# Altium PCB NU-SYNTHS_MIDICV_CONN_8HP.PcbDoc
Units mm, origin at the board's own origin, x right, y up, seen from the top; angles counter-clockwise.
Board outline 39.3 x 106.5 mm, 2 copper layers (Top Layer, Bottom Layer), stack 1.55 mm thick; 48 components, 49 nets, 196 pads, 36 vias.
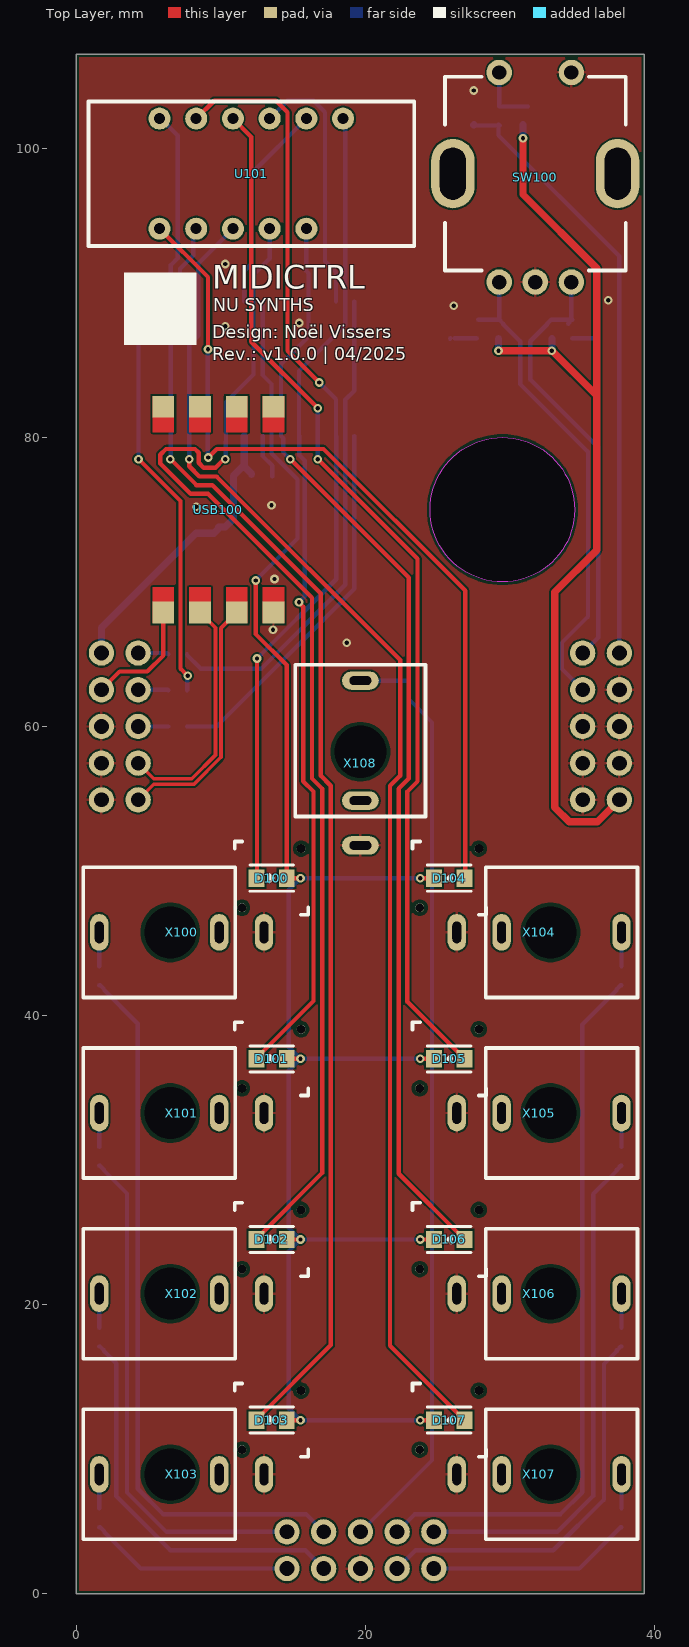
[diagram p0: Top Layer view]
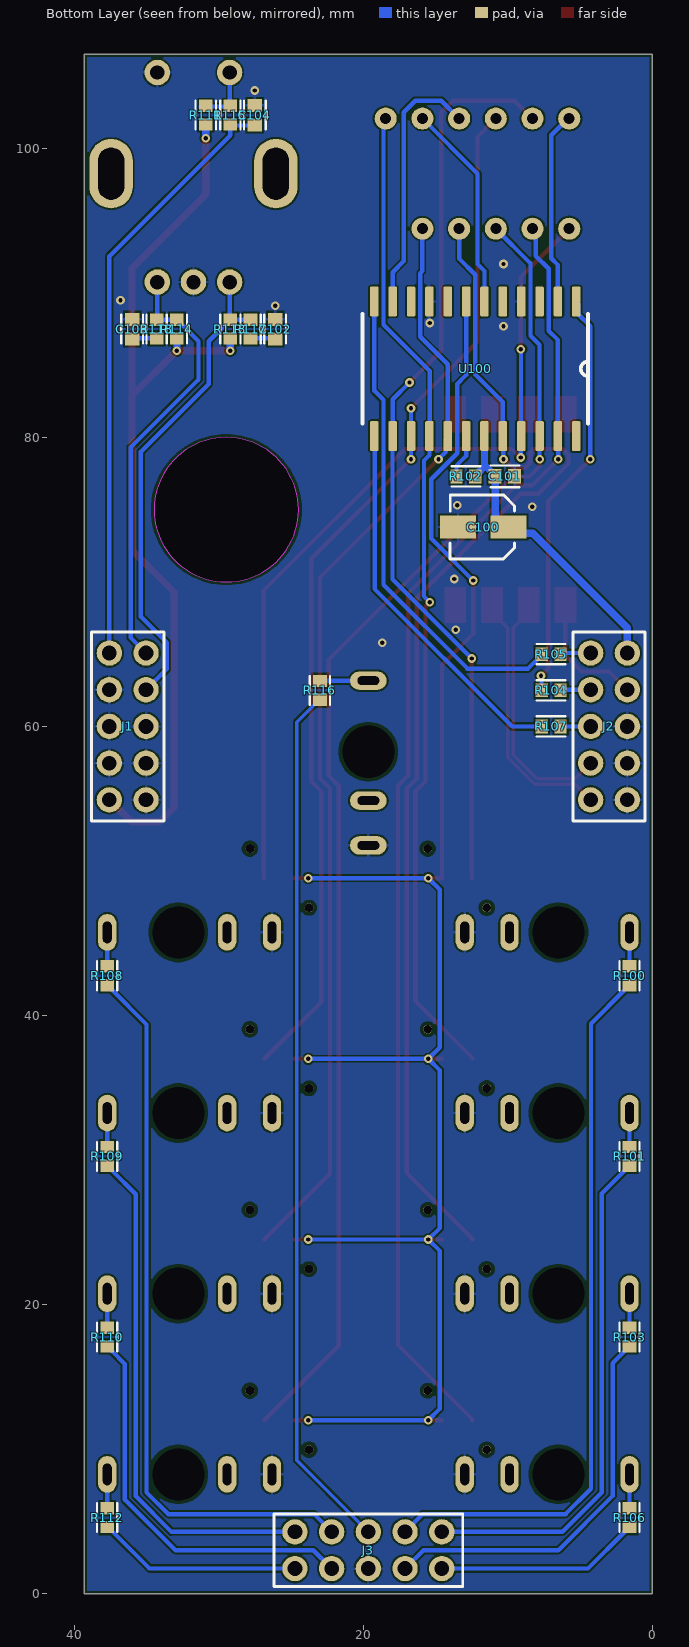
[diagram p1: Bottom Layer view, seen from below]
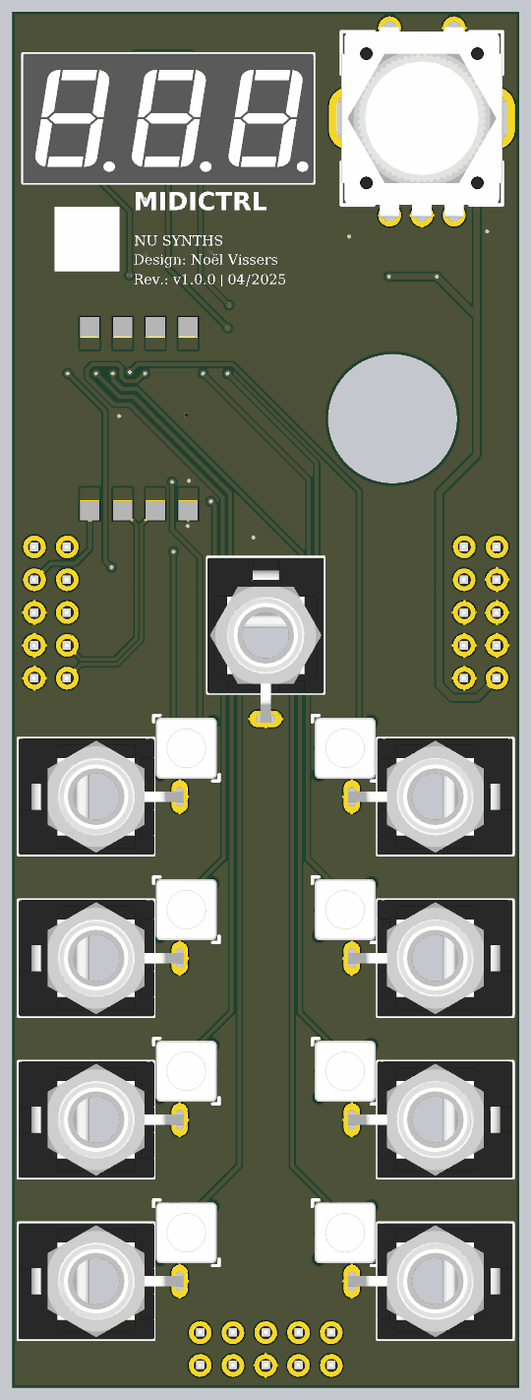
[diagram p2: 3D render of the assembled board from above, using the file's embedded part models]
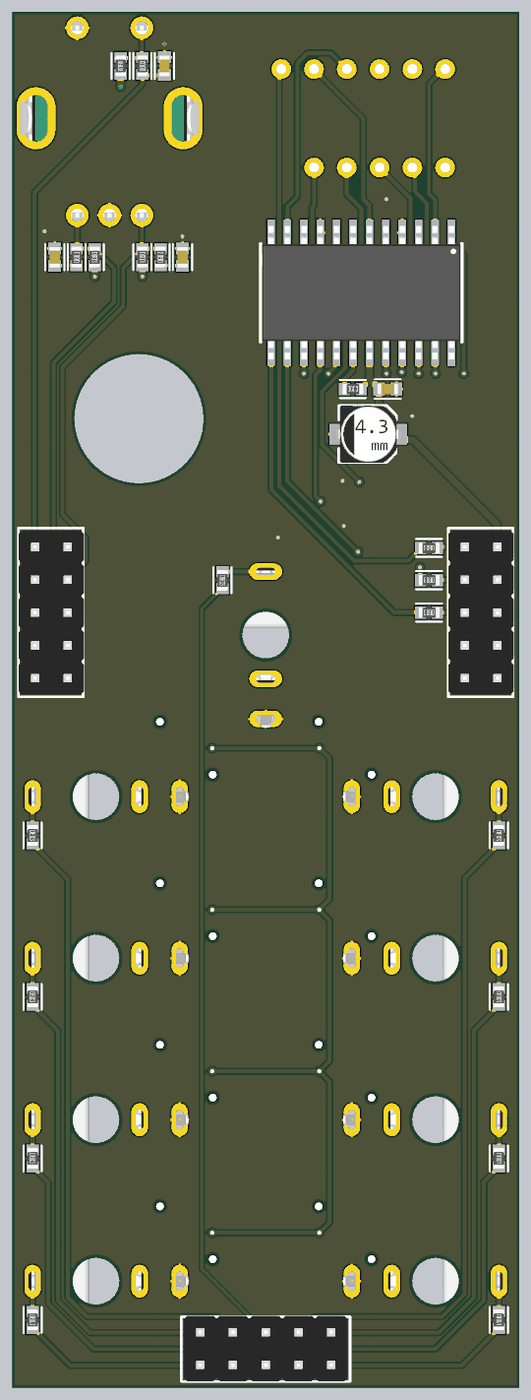
[diagram p3: 3D render of the assembled board from below, using the file's embedded part models]

## Layer stack, top to bottom
Top Solder: solder mask 0.0127, Solder Resist, Dk 3.5
Top Layer: signal copper 0.025
Dielectric 1: dielectric 1.5, FR-4, Dk 4.8
Bottom Layer: signal copper 0.025
Bottom Solder: solder mask 0.0127, Solder Resist, Dk 3.5

## Board outline
0,0 39.3,0 39.3,106.5 0,106.5
cut-out: 29.475,70 cw(c29.475,75) 24.475,75 cw(c29.475,75) 29.475,80 cw(c29.475,75) 34.475,75 cw(c29.475,75)

## Design rules (kind name [scope] priority, off if disabled: settings)
BoardOutlineClearance [All] p1: gap=0.2 ignorepadtopadclearanceinfootprint=FALSE
Clearance [All] p1: gap=0.127 ignorepadtopadclearanceinfootprint=FALSE except(0.25: Arc-Hole Track-Hole SMDPad-Hole THPad-Hole Via-Hole Fill-Hole Poly-Hole Region-Hole Text-Hole)
ComponentClearance [All] p1: gap=0.127 collisioncheckmode=3 verticalgap=0.127 showdistances=TRUE
DiffPairsRouting [All] p1: maxlimit=0.254 minlimit=0.127 mostfreqgap=0.127 toplayer_minwidth=0.127 toplayer_maxwidth=25.4 toplayer_prefwidth=0.127 bottomlayer_minwidth=0.127 bottomlayer_maxwidth=25.4 bottomlayer_prefwidth=0.127 maxuncoupledlength=12.7
Height [All] p1: minheight=0 maxheight=1816.048 prefheight=12.7
HoleSize [All] p1: absolutevalues=TRUE maxlimit=6.3 minlimit=0.3 maxpercent=80.000 minpercent=20.000
HoleToHoleClearance [All] p1: gap=0.25 allowstackedmicrovias=FALSE
MinimumAnnularRing [All] p1: minimumring=0.076
MinimumSolderMaskSliver [All] p1: minsoldermaskwidth=0
PlaneClearance [All] p1: clearance=0.127
PlaneConnect PlaneConnectPowerPads [InPadClass('PowerPads')] p1: planeconnectstyle=Direct reliefexpansion=0.508 reliefentries=4 reliefconductorwidth=0.254 reliefairgap=0.254
PlaneConnect [All] p2: pad.planeconnectstyle=Relief pad.reliefexpansion=0.3 pad.reliefentries=4 pad.reliefconductorwidth=0.127 pad.reliefairgap=0.127 via.planeconnectstyle=Direct via.reliefexpansion=0.3 via.reliefentries=4 via.reliefconductorwidth=0.127 via.reliefairgap=0.127
PolygonConnect PolygonConnectPowerPads [All vs (InPadClass('PowerPads'))] p1: connectstyle=Direct reliefconductorwidth=0.254 reliefentries=4 polygonreliefangle="90 Angle" airgapwidth=0.254
PolygonConnect [All] p2: thpad.connectstyle=Relief thpad.reliefconductorwidth=0.2 thpad.reliefentries=4 thpad.polygonreliefangle="90 Angle" thpad.airgapwidth=0.127 smdpad.connectstyle=Relief smdpad.reliefconductorwidth=0.2 smdpad.reliefentries=4 smdpad.polygonreliefangle="90 Angle" smdpad.airgapwidth=0.127 via.connectstyle=Direct via.reliefconductorwidth=0.127 via.reliefentries=4 via.polygonreliefangle="90 Angle" via.airgapwidth=0.127
RoomDefinition NU-SYNTHS_MIDICV_CONN [InComponentClass('NU-SYNTHS_MIDICV_CONN')] p1: confinementstyle=ConfineIn formatcopy=TRUE lockcomponents=FALSE outline 0,0 39.3,0 39.3,106.5 0,106.5
RoutingVias [All] p1: holewidth=0.3 width=0.6 viastyle="Through Hole" minholewidth=0.3 minwidth=0.6 maxholewidth=0.6 maxwidth=6.6
SilkToSilkClearance [All] p1: silktosilkclearance=0
SilkToSolderMaskClearance [IsPad] p1: minsilkscreentomaskgap=0.127 clearancetoexposedcopper=TRUE
SolderMaskExpansion [All] p1: expansion=0.075 istentingtop=FALSE
SupplyNets "Schematic Supply Nets_3" [InNet('+3V3')] p1: voltage=0.000
SupplyNets "Schematic Supply Nets_2" [InNet('GND')] p2: voltage=0.000
SupplyNets "Schematic Supply Nets_1" [InNet('VBUS')] p3: voltage=0.000
SupplyNets "Schematic Supply Nets" [InNet('+5V')] p4: voltage=0.000
Width [All] p1: maxlimit=25.4 minlimit=0.127 preferedwidth=0.127 minimp=50.000000 maximp=50.000000 favimp=50.000000
20 further rules are at their usual default settings.

## Classes and differential pairs
differential pair USB_D: +USB_D_P -USB_D_N

## Components (designator, comment, footprint, x,y, rotation, side; value= is the part's Value field where it differs from the comment)
C100 "10 µF" "CAP ALSMD 4.3MM H5.4MM" 11.7,73.8 r0 bottom
C101 "0.1 µF" "CAP 0603_1608" 10.2,77.3 r0 bottom
C102 "10000 pF" "CAP 0603_1608" 26.1,87.5 r270 bottom
C103 "10000 pF" "CAP 0603_1608" 36,87.5 r270 bottom
C104 "0.1 µF" "CAP 0603_1608" 27.5,102.3 r270 bottom
D100 "150080RS75000" LED0805_PIPE 13.5,49.5 r180 top locked
D101 "150080RS75000" LED0805_PIPE 13.5,37 r180 top locked
D102 "150080RS75000" LED0805_PIPE 13.5,24.5 r180 top locked
D103 "150080RS75000" LED0805_PIPE 13.5,12 r180 top locked
D104 "150080RS75000" LED0805_PIPE 25.8,49.5 r0 top locked
D105 "150080RS75000" LED0805_PIPE 25.8,37 r0 top locked
D106 "150080RS75000" LED0805_PIPE 25.8,24.5 r0 top locked
D107 "150080RS75000" LED0805_PIPE 25.8,12 r0 top
J1 "GENERIC_HEADER_2x5" HEADER_2x5_TH_MALE_MIRRORED 36.3,60 r180 bottom
J2 "GENERIC_HEADER_2x5" HEADER_2x5_TH_MALE_MIRRORED 3,60 r180 bottom
J3 "GENERIC_HEADER_2x5" HEADER_2x5_TH_MALE_MIRRORED 19.65,3 r90 bottom
R100 "1 kOhms" "RES 0603_1608" 1.58,42.75 r270 bottom
R101 "1 kOhms" "RES 0603_1608" 1.58,30.25 r270 bottom
R102 "9.53 kOhms" "RES 0603_1608" 12.9,77.3 r180 bottom
R103 "1 kOhms" "RES 0603_1608" 1.58,17.75 r270 bottom
R104 "27 Ohms" "RES 0603_1608" 7,62.5 r0 bottom
R105 "27 Ohms" "RES 0603_1608" 7,65 r0 bottom
R106 "1 kOhms" "RES 0603_1608" 1.58,5.25 r270 bottom
R107 "27 Ohms" "RES 0603_1608" 7,60 r0 bottom
R108 "1 kOhms" "RES 0603_1608" 37.72,42.75 r270 bottom
R109 "1 kOhms" "RES 0603_1608" 37.72,30.25 r270 bottom
R110 "1 kOhms" "RES 0603_1608" 37.72,17.75 r270 bottom
R111 "100 kOhms" "RES 0603_1608" 30.9,102.3 r270 bottom
R112 "1 kOhms" "RES 0603_1608" 37.72,5.25 r270 bottom
R113 "10 kOhms" "RES 0603_1608" 29.2,87.5 r270 bottom
R114 "10 kOhms" "RES 0603_1608" 32.9,87.5 r270 bottom
R115 "10 kOhms" "RES 0603_1608" 29.2,102.3 r90 bottom
R116 "1 kOhms" "RES 0603_1608" 23,62.5 r270 bottom
R117 "10 kOhms" "RES 0603_1608" 27.8,87.5 r90 bottom
R118 "10 kOhms" "RES 0603_1608" 34.3,87.5 r90 bottom
SW100 "PEC11R-4220K-S0024" PEC11R-4220K-S0024 31.75,98.25 r0 top locked
U100 "MAX7221" SOIC127P1032X265-24N 12.25,84.75 r270 bottom
U101 "LDT-N2804RI" LDT-N2804RI 5.75,94.44 r0 top locked
USB100 "USB_Type_C_Breakout" USBC_BREAKOUT_NO_TH 9.825,75 r0 top locked
X100 "PJ398SM" PJ398SM 1.58,45.75 r90 top locked
X101 "PJ398SM" PJ398SM 1.58,33.25 r90 top locked
X102 "PJ398SM" PJ398SM 1.58,20.75 r90 top locked
X103 "PJ398SM" PJ398SM 1.58,8.25 r90 top locked
X104 "PJ398SM" PJ398SM 37.72,45.75 r270 top locked
X105 "PJ398SM" PJ398SM 37.72,33.25 r270 top locked
X106 "PJ398SM" PJ398SM 37.72,20.75 r270 top locked
X107 "PJ398SM" PJ398SM 37.72,8.25 r270 top locked
X108 "PJ398SM" PJ398SM 19.65,63.17 r0 top locked

## Footprints (in the part's own frame and the unit in brackets; to place one, negate y for a bottom-side part, rotate by r counter-clockwise, add the part's x,y. Pads: shape width x height; smd on the part's side, far side on the other; paste and mask are expansions set on the pad)
"CAP 0603_1608" [mm] "Chip Capacitor, 2-Leads, Body 1.60x0.80mm, IPC Medium Density"
  rect 0.9x1 smd: 1(-0.675,0) 2(0.675,0)
  silkscreen extent -1,-0.75 1,0.75, body extent -0.8,-0.41 0.8,0.41, height 0.82
"CAP ALSMD 4.3MM H5.4MM" [mm] "Aluminum Electrolytic Capacitor, Body 4.30x4.30x5.40mm, IPC Low Density"
  rect 2.5x1.6 smd: 1(-1.75,0) 2(1.75,0)
  silkscreen extent -2.17,-2.21 2.3,2.2, body extent -2.3,-2.2 2.3,2.2, height 5.4
HEADER_2x5_TH_MALE_MIRRORED [mm] "2.54mm 2x5 MALE"
  round 1.75 hole 1.02: 1(1.27,5.08) 2(-1.27,5.08) 3(1.27,2.54) 4(-1.27,2.54) 5(1.27,0) 6(-1.27,0) 7(1.27,-2.54) 8(-1.27,-2.54) 9(1.27,-5.08) 10(-1.27,-5.08)
  silkscreen extent -2.5,-6.53 2.5,6.54, body extent -2.5,-6.35 2.58,6.35, height 8.91
LDT-N2804RI [mil] "Common Cathode, 3 Digit 7 Segment Display, 0.28''"
  round 60 hole 30: 1(0,0) 2(100,0) 3(200,0) 4(300,0) 5(400,0) 7(500,300) 8(400,300) 9(300,300) 10(200,300) 11(100,300) 12(0,300)
  silkscreen extent -194,-47 694,347, body extent -194,-47 694,347, height 315
LED0805_PIPE [mm]
  rect 1.1x1.2 smd: 1(-1.05,0) 2(1.05,0)
  round 0.61 hole 0.61 unplated: ""(-2.045,-2.045) ""(2.045,2.045)
  silkscreen extent -2.54,-2.54 2.54,2.54, body extent -2.35,-2.35 2.35,2.35, height 12.7
PEC11R-4220K-S0024 [mm] "Encoders 20mm SHAFT w/SWITCH"
  round 1.762 hole 1: 1(-2.5,7) 2(2.5,7) A(-2.5,-7.5) B(2.5,-7.5) C(0,-7.5)
  oval 3x4.8 hole 1.8 slot 3.6 at 90 deg: S1(-5.7,0) S2(5.7,0)
  silkscreen extent -6.25,-6.7 6.25,6.7, body extent -6.93,-7.68 6.93,7.18, height 3.29
PJ398SM [mm] "Vertical mount 3.5mm switching mono phone jack"
  oval 2.54x1.27 hole 0.6 slot 1.5 at 0 deg: 1(0,-11.4) 2(0,-8.3) 3(0,0)
  round 0 hole 3.6 unplated: NC(0,-4.92)
  silkscreen extent -4.5,-9.4 4.5,1.1, body extent -4.5,-12.09 4.5,1.07, height 14.53
"RES 0603_1608" [mm] "Chip Resistor, 2-Leads, Body 1.60x0.80mm, IPC Medium Density"
  rect 0.85x0.95 smd: 1(-0.65,0) 2(0.65,0)
  silkscreen extent -1,-0.7 1,0.7, body extent -0.8,-0.4 0.8,0.4, height 0.45
SOIC127P1032X265-24N [mm] "24 PIN SOIC PACKAGE"
  rrect25% 2.05x0.59 smd: 1(-4.655,6.985) 2(-4.655,5.715) 3(-4.655,4.445) 4(-4.655,3.175) 5(-4.655,1.905) 6(-4.655,0.635) 7(-4.655,-0.635) 8(-4.655,-1.905) 9(-4.655,-3.175) 10(-4.655,-4.445) 11(-4.655,-5.715) 12(-4.655,-6.985) 13(4.655,-6.985) 14(4.655,-5.715) 15(4.655,-4.445) 16(4.655,-3.175) 17(4.655,-1.905) 18(4.655,-0.635) 19(4.655,0.635) 20(4.655,1.905) 21(4.655,3.175) 22(4.655,4.445) 23(4.655,5.715) 24(4.655,6.985)
  silkscreen extent -3.8,-7.8 3.8,7.8, body extent -5.16,-7.7 5.16,7.7, height 2.62
USBC_BREAKOUT_NO_TH [mm]
  rect 1.5x1.5 smd: 1(-3.81,-7.112) 2(-1.27,-7.112) 3(1.27,-7.112) 4(3.81,-7.112) 5(3.81,7.112) 6(1.27,7.112) 7(-1.27,7.112) 8(-3.81,7.112)
  Top Layer region: -3.06,7.85 -4.56,7.85 -4.56,5.35 -3.06,5.35
  Top Layer region: -0.52,7.85 -2.02,7.85 -2.02,5.35 -0.52,5.35
  Top Layer region: 2.02,7.85 0.52,7.85 0.52,5.35 2.02,5.35
  Top Layer region: 4.56,7.85 3.06,7.85 3.06,5.35 4.56,5.35
  Top Layer region: 3.06,-7.85 4.56,-7.85 4.56,-5.35 3.06,-5.35
  Top Layer region: -4.56,-7.85 -3.06,-7.85 -3.06,-5.35 -4.56,-5.35
  Top Layer region: -2.02,-7.85 -0.52,-7.85 -0.52,-5.35 -2.02,-5.35
  Top Layer region: 0.52,-7.85 2.02,-7.85 2.02,-5.35 0.52,-5.35

## Part data
C100: library part UWX1C100MCL1GB, "CAP ALUM 10UF 20% 16V SMD", Device Package="Radial, Can - SMD", Lifetime @ Temp.="2000 Hrs @ 85°C", manufacturer=Nichicon, Operating Temperature="-40°C ~ 85°C", Ripple Current @ High Frequency="34.5 mA @ 10 kHz", Ripple Current @ Low Frequency="23 mA @ 120 Hz", Supplier Part Number 1=493-2100-1-ND, Tolerance=±20%, Voltage - Rated="16 V", Applications="General Purpose", Capacitance="10 µF", componentlink1description=Datasheet, componentlink1url=https://products.nichicon.co.jp/en/pdf/XJA043/e-uwx.pdf, componentlink2description="DigiKey Link", componentlink2url=https://www.digikey.com/en/products/detail/nichicon/UWX1C100MCL1GB/589841, Height - Seated (Max)="0.213\" (5.40mm)", lastupdated="03/06/2024 19:53:00", Lifecycle Status=Active, Minimum Order=1, Mounting Type="Surface Mount", Package / Case="Radial, Can - SMD", packaging=TapeAndReel, Part Number=UWX1C100MCL1GB, Part Status=Active, partid=7030, Polarization=Polar, price=0.06, series=UWX, Size / Dimension="0.157\" Dia (4.00mm)", Supplier 1=DigiKey, Surface Mount Land Size="0.169\" L x 0.169\" W (4.30mm x 4.30mm)"
C101 C104: library part CC0603MRY5V8BB104, "CAP CER 0.1UF 25V Y5V 0603", Device Package="0603 (1608 Metric)", manufacturer=Yageo, Operating Temperature="-30°C ~ 85°C", Supplier Part Number 1=311-1363-1-ND, Temperature Coefficient="Y5V (F)", Tolerance=±20%, Voltage - Rated=25V, Applications="General Purpose", Capacitance="0.1 µF", componentlink1description=Datasheet, componentlink1url=http://www.yageo.com/documents/recent/UPY-GPHC_Y5V_6.3V-to-50V_8.pdf, componentlink2description="DigiKey Link", componentlink2url=https://www.digikey.com/en/products/detail/yageo/CC0603MRY5V8BB104/2103101, lastupdated="09/02/2024 20:10:27", Lifecycle Status=Active, Minimum Order=1, Mounting Type="Surface Mount, MLCC", Package / Case="0603 (1608 Metric)", packaging=TapeAndReel, Part Number=CC0603MRY5V8BB104, Part Status=Active, partid=5132, price=0.01, series=CC, Size / Dimension="0.063\" L x 0.031\" W (1.60mm x 0.80mm)", Supplier 1=DigiKey, Thickness (Max)="0.035\" (0.90mm)"
C102 C103: library part CC0603KRX7R9BB103, "CAP CER 10000PF 50V X7R 0603", Device Package="0603 (1608 Metric)", manufacturer=Yageo, Operating Temperature="-55°C ~ 125°C", Supplier Part Number 1=311-1085-1-ND, Temperature Coefficient=X7R, Tolerance=±10%, Voltage - Rated=50V, Applications="General Purpose", Capacitance="10000 pF", componentlink1description=Datasheet, componentlink1url=https://www.yageo.com/upload/media/product/productsearch/datasheet/mlcc/UPY-GPHC_X7R_6.3V-to-50V_18.pdf, componentlink2description="DigiKey Link", componentlink2url=https://www.digikey.com/en/products/detail/yageo/CC0603KRX7R9BB103/302819, lastupdated="09/02/2024 20:10:06", Lifecycle Status=Active, Minimum Order=1, Mounting Type="Surface Mount, MLCC", Package / Case="0603 (1608 Metric)", packaging=TapeAndReel, Part Number=CC0603KRX7R9BB103, Part Status=Active, partid=17848, price=0.01, series=CC, Size / Dimension="0.063\" L x 0.031\" W (1.60mm x 0.80mm)", Supplier 1=DigiKey, Thickness (Max)="0.035\" (0.90mm)"
D100 D101 D102 D103 D104 D105 D106 D107: "Standard LEDs - SMD WL-SMCW SMDMono TpVw Waterclr 0805 Red"
J1 J2 J3: "Generic 2x5 header", Supplier Part Number 1=2396199, Supplier 1=Farnell
R100 R101 R103 R106 R108 R109 R110 R112 R116: library part CRCW06031K00FKEAC, "RES 1K OHM 1% 1/10W 0603", Device Package="0603 (1608 Metric)", manufacturer="Vishay Dale", Operating Temperature="-55°C ~ 155°C", Power (Watts)="0.1W, 1/10W", Supplier Device Package=0603, Supplier Part Number 1=541-3949-1-ND, Temperature Coefficient=±100ppm/°C, Tolerance=±1%, componentlink1description=Datasheet, componentlink1url=http://www.vishay.com/docs/28773/crcwce3.pdf, componentlink2description="DigiKey Link", componentlink2url=https://www.digikey.com/en/products/detail/vishay-dale/CRCW06031K00FKEAC/7928371, Composition="Thick Film", Height - Seated (Max)="0.022\" (0.55mm)", lastupdated="09/02/2024 20:43:06", Lifecycle Status=Active, Minimum Order=1, Number of Terminations=2, Package / Case="0603 (1608 Metric)", packaging=CutTape, Part Number=CRCW06031K00FKEAC, Part Status=Active, partid=12551, price=0.01, Resistance="1 kOhms", series=CRCW-C, Supplier 1=DigiKey
R102: library part CRCW06039K53FKEA, "RES SMD 9.53K OHM 1% 1/10W 0603", Device Package="0603 (1608 Metric)", manufacturer="Vishay Dale", Operating Temperature="-55°C ~ 155°C", Power (Watts)="0.1W, 1/10W", Ratings=AEC-Q200, Supplier Device Package=0603, Supplier Part Number 1=541-9.53KHCT-ND, Temperature Coefficient=±100ppm/°C, Tolerance=±1%, componentlink1description=Datasheet, componentlink1url=http://www.vishay.com/docs/20035/dcrcwe3.pdf, componentlink2description="DigiKey Link", componentlink2url=https://www.digikey.com/en/products/detail/vishay-dale/CRCW06039K53FKEA/1174780, Composition="Thick Film", Features="Automotive AEC-Q200", Height - Seated (Max)="0.020\" (0.50mm)", lastupdated="09/02/2024 20:42:37", Lifecycle Status=Active, Minimum Order=1, Number of Terminations=2, Package / Case="0603 (1608 Metric)", packaging=TapeAndReel, Part Number=CRCW06039K53FKEA, Part Status=Active, partid=20117, price=0.01, Resistance="9.53 kOhms", series=CRCW, Size / Dimension="0.061\" L x 0.033\" W (1.55mm x 0.85mm)", Supplier 1=DigiKey
R104 R105 R107: library part CRCW060327R0FKEA, "RES SMD 27 OHM 1% 1/10W 0603", Device Package="0603 (1608 Metric)", manufacturer="Vishay Dale", Operating Temperature="-55°C ~ 155°C", Power (Watts)="0.1W, 1/10W", Ratings=AEC-Q200, Supplier Device Package=0603, Supplier Part Number 1=541-27.0HCT-ND, Temperature Coefficient=±100ppm/°C, Tolerance=±1%, componentlink1description=Datasheet, componentlink1url=http://www.vishay.com/docs/20035/dcrcwe3.pdf, componentlink2description="DigiKey Link", componentlink2url=https://www.digikey.com/en/products/detail/vishay-dale/CRCW060327R0FKEA/1174487, Composition="Thick Film", Features="Automotive AEC-Q200", Height - Seated (Max)="0.020\" (0.50mm)", lastupdated="09/02/2024 20:43:24", Lifecycle Status=Active, Minimum Order=1, Number of Terminations=2, Package / Case="0603 (1608 Metric)", packaging=TapeAndReel, Part Number=CRCW060327R0FKEA, Part Status=Active, partid=8035, price=0.01, Resistance="27 Ohms", series=CRCW, Size / Dimension="0.061\" L x 0.033\" W (1.55mm x 0.85mm)", Supplier 1=DigiKey
R111: library part CRCW0603100KFKEAC, "RES 100K OHM 1% 1/10W 0603", Device Package="0603 (1608 Metric)", manufacturer="Vishay Dale", Operating Temperature="-55°C ~ 155°C", Power (Watts)="0.1W, 1/10W", Supplier Device Package=0603, Supplier Part Number 1=541-3950-1-ND, Temperature Coefficient=±100ppm/°C, Tolerance=±1%, componentlink1description=Datasheet, componentlink1url=http://www.vishay.com/docs/28773/crcwce3.pdf, componentlink2description="DigiKey Link", componentlink2url=https://www.digikey.com/en/products/detail/vishay-dale/CRCW0603100KFKEAC/7928372, Composition="Thick Film", Height - Seated (Max)="0.022\" (0.55mm)", lastupdated="09/02/2024 20:43:06", Lifecycle Status=Active, Minimum Order=1, Number of Terminations=2, Package / Case="0603 (1608 Metric)", packaging=CutTape, Part Number=CRCW0603100KFKEAC, Part Status=Active, partid=12549, price=0.01, Resistance="100 kOhms", series=CRCW-C, Supplier 1=DigiKey
R113 R114 R115 R117 R118: library part CRCW060310K0FKTA, "RES SMD 10K OHM 1% 1/10W 0603", Device Package="0603 (1608 Metric)", manufacturer="Vishay Dale", Operating Temperature="-55°C ~ 155°C", Power (Watts)="0.1W, 1/10W", Ratings=AEC-Q200, Supplier Device Package=0603, Supplier Part Number 1=541-2980-1-ND, Temperature Coefficient=±100ppm/°C, Tolerance=±1%, componentlink1description=Datasheet, componentlink1url=http://www.vishay.com/docs/20008/dcrcw.pdf, componentlink2description="DigiKey Link", componentlink2url=https://www.digikey.com/en/products/detail/vishay-dale/CRCW060310K0FKTA/1221625, Composition="Thick Film", Features="Automotive AEC-Q200", Height - Seated (Max)="0.020\" (0.50mm)", lastupdated="12/07/2023 19:33:59", Lifecycle Status=Active, Minimum Order=1, Number of Terminations=2, Package / Case="0603 (1608 Metric)", packaging=TapeAndReel, Part Number=CRCW060310K0FKTA, Part Status=Active, partid=9687, price=0.01, Resistance="10 kOhms", series=CRCW, Size / Dimension="0.063\" L x 0.033\" W (1.60mm x 0.85mm)", Supplier 1=DigiKey
SW100: "Encoders 20mm SHAFT w/SWITCH", Supplier Part Number 1=PEC11R-4220K-S0024-ND, Supplier Part Number 10=PEC12R-4125F-S0012-ND, Supplier Part Number 11=PEC12R-4220F-S0024-ND, Supplier 1=Digi-Key, Supplier 2=Digi-Key, Supplier 3=Digi-Key, Supplier 4=Digi-Key, Supplier 5=Digi-Key, Supplier 6=Newark, Supplier 7=Digi-Key, Supplier 8=Digi-Key, Supplier 9=Newark, Supplier 10=Digi-Key, Supplier 11=Digi-Key, Supplier Part Number 2=PEC12R-4117F-S0012-ND, Supplier Part Number 3=PEC12R-4017F-N0024-ND, Supplier Part Number 4=PEC12R-4025F-S0024-ND, Supplier Part Number 5=PEC11R-4220F-S0024-ND, Supplier Part Number 6=53W9488, Supplier Part Number 7=PEC11R-4215K-S0024-ND, Supplier Part Number 8=PEC11R-4225F-S0024-ND, Supplier Part Number 9=53W9583
U100: "LED Driver, 4V to 5.5V input, 8 Outputs, 10 MHz Switch. Frequency, 4.5V/320 mA out, SOIC-24", Supplier Part Number 1=1897548, Supplier 1=RSComponents
U101: "Common Cathode, 3 Digit 7 Segment Display, 0.28''", Supplier Part Number 1=67-2308-ND, Supplier 1=Digi-Key
USB100: library part USBC_Breakout, "USB type C Breakout Board"
X100 X101 X102 X103 X104 X105 X106 X107 X108: "Vertical mount 3.5mm switching mono jack."

## Via types
v1: diameter 0.6, hole 0.3, Top Layer to Bottom Layer, tented both sides, 36 vias

## Nets (pads, with @x,y where several pads share a name; then routed paths per layer and width w, separated by ;. In a path a pad name is that pad's centre, name@x,y a point inside that pad or via, vN(x,y) a via of type N, cw(c..) or ccw(c..) an arc to the next point about the centre after c; other vN are vias at no path point)
+3V3: J1.10 R111.2 R113.2 R114.2 | length 65.9
  Top Layer w0.5: v1(29.2,86) v1(32.9,86) 36,82.9 ; v1(30.9,100.7) 30.9,96.8 36,91.7 36,82.9 ; J1.10 36.05,53.4 34.1,53.4 33.1,54.4 33.1,69.3 36,72.2 36,82.9
  Bottom Layer w0.5: v1(29.2,86) R113.2 ; v1(30.9,100.7) R111.2 ; v1(32.9,86) R114.2
+5V: C100.1 C101.2 J2.1 R102.2 U100.19 | length 21
  Bottom Layer w0.5: J2.1 1.73,66.83 8.27,73.37 9.52,73.37 C100.1 ; C100.1@9.85,73.8 10.3,73.8 10.85,74.35 10.85,74.618 10.875,74.643 C101.2 10.875,77.35 11.51,77.985 11.615,77.985 ; U100.19 11.615,77.985 ; R102.2@12.121,77.429 12.121,77.479 11.615,77.985
CV1: J3.7 R100.2 | length 50.1
  Bottom Layer w0.3: R100.2 1.63,42.1 1.905,41.825 1.905,41.775 4.25,39.43 4.25,7.25 6,5.5 15.88,5.5 J3.7
CV2: J3.9 R101.2 | length 35.6
  Bottom Layer w0.3: R101.2 1.63,29.6 1.905,29.325 1.905,29.275 3.5,27.68 3.5,7 6.23,4.27 J3.9
CV3: J3.8 R103.2 | length 27.3
  Bottom Layer w0.3: R103.2 1.63,17.1 1.905,16.825 1.905,16.775 2.75,15.93 2.75,6.75 6.5,3 15.84,3 J3.8
CV4: J3.10 R106.2 | length 14.2
  Bottom Layer w0.3: R106.2 1.63,4.6 1.905,4.325 1.905,4.275 4.45,1.73 J3.10
DIG_3: D100.1 D101.1 D102.1 D103.1 D104.1 D105.1 D106.1 D107.1 U100.7 | length 123.3
  Top Layer w0.3: v1(12.4,70.1) 12.4,66.4 14.55,64.25 D100.1 v1(15.5,49.5) ; D103.1 v1(15.5,12) ; D102.1 v1(15.5,24.5) ; D101.1 v1(15.5,37) ; v1(23.8,12) D107.1 ; v1(23.8,24.5) D106.1 ; v1(23.8,37) D105.1 ; v1(23.8,49.5) D104.1
  Bottom Layer w0.3: v1(12.4,70.1) 15.3,73 15.3,77.1 13.5,78.9 13.5,83.7 12.885,84.315 U100.7 ; v1(23.8,12) v1(15.5,12) 14.7,12.8 14.7,23.7 v1(15.5,24.5) ; v1(23.8,24.5) v1(15.5,24.5) ; v1(23.8,37) v1(15.5,37) ; v1(23.8,49.5) v1(15.5,49.5) 14.7,48.7 14.7,37.8 v1(15.5,37) ; v1(15.5,24.5) 14.7,25.3 14.7,36.2 v1(15.5,37)
DISP_CLK: J2.6 R107.1 | length 2.1
  Bottom Layer w0.3: J2.6 R107.1
DISP_CS: J2.2 R105.1 | length 2.1
  Bottom Layer w0.3: J2.2 6.27,65.08 R105.1
DISP_DIN: J2.4 R104.1 | length 2.1
  Bottom Layer w0.3: J2.4 6.31,62.54 R104.1
ENC_A: J1.3 R113.1 R117.2 SW100.A | length 33.6
  Bottom Layer w0.3: R117.2 R113.1@29.25,88.15 ; SW100.A R113.1@29.25,88.15 ; J1.3 33.6,63.97 33.6,65.8 35.4,67.6 35.4,79 30.7,83.7 30.7,86.65 29.525,87.825 29.525,87.875 R113.1@29.25,88.15 ; R113.1@29.25,88.15 R113.1 R113.1@29.25,88.15
ENC_B: J1.1 R114.1 R118.2 SW100.B | length 30.5
  Bottom Layer w0.3: R114.1 R114.1@32.85,88.15 ; R118.2@34.025,87.875 R118.2 R118.2@34.25,88.15 ; SW100.B R118.2@34.25,88.15 ; J1.1 36.1,66.15 36.1,79.3 31.4,84 31.4,86.65 32.575,87.825 32.575,87.875 R114.1@32.85,88.15 ; R114.1@32.85,88.15 R118.2@34.25,88.15
ENC_PB: C104.2 J1.2 R115.1 | length 41.9
  Bottom Layer w0.3: C104.2@27.513,101.588 R115.1@29.312,101.588 ; R115.1 29.2,100.9 37.57,92.53 J1.2
  Bottom Layer w0.5: C104.2 C104.2@27.513,101.638
GATE1: J3.3 R108.2 | length 50.2
  Bottom Layer w0.3: J3.3 23.42,5.5 33.5,5.5 35,7 35,39.38 37.395,41.775 37.395,41.825 37.67,42.1 R108.2
GATE2: J3.1 R109.2 | length 35.7
  Bottom Layer w0.3: J3.1 33.27,4.27 35.75,6.75 35.75,27.63 37.395,29.275 37.395,29.325 37.67,29.6 R109.2
GATE3: J3.4 R110.2 | length 27.4
  Bottom Layer w0.3: J3.4 23.46,3 33,3 36.5,6.5 36.5,15.88 37.395,16.775 37.395,16.825 37.67,17.1 R110.2
GATE4: J3.2 R112.2 | length 14.2
  Bottom Layer w0.3: J3.2 34.8,1.73 37.67,4.6 R112.2
GND: C100.2 C101.1 C102.1 C103.1 C104.1 J1.4 J1.5 J1.6 J1.7 J1.8 J1.9 J2.5 J2.7 J2.9 J3.6 SW100.2 SW100.C U100.4 U100.9 USB100.4 X100.1 X101.1 X102.1 X103.1 X104.1 X105.1 X106.1 X107.1 X108.1 | length 0.1
  Top Layer w0.381: USB100.4@13.6,67.853 USB100.4
  Bottom Layer w0.381: U100.9@15.413,89.393 U100.9 ; C103.1 C103.1@36.012,88.187
  other v1: 18.7,65.8 13.6,66.7 13.7,70.2 8.3,75.2 13.5,75.3 10.3,87.7 15.413,87.913 26.1,89.1 36.8,89.5 10.3,92 27.5,104
NetC102_2: C102.2 R117.1 | length 1.6
  Bottom Layer w0.3: C102.2@25.85,86.825 C102.2@25.875,86.85 ; C102.2@26.175,86.85 R117.1@27.7,86.85
NetC103_2: C103.2 R118.1 | length 1.7
  Bottom Layer w0.3: R118.1 35.975,86.85 C103.2
NetR100_1: R100.1 X100.3 | length 2.3
  Bottom Layer w0.3: R100.1 X100.3
NetR101_1: R101.1 X101.3 | length 2.3
  Bottom Layer w0.3: R101.1 X101.3
NetR102_1: R102.1 U100.18 | length 3.1
  Bottom Layer w0.3: U100.18 12.885,78.715 13.55,78.05 R102.1
NetR103_1: R103.1 X102.3 | length 2.3
  Bottom Layer w0.3: R103.1 X102.3
NetR104_2: R104.2 U100.1 | length 28.7
  Top Layer w0.3: v1(4.3,78.5) 7.2,75.6 7.2,64 v1(7.7,63.5)
  Bottom Layer w0.3: v1(4.3,78.5) 4.3,87.7 5.12,88.52 5.12,89.26 U100.1 ; R104.2 7.675,62.525 7.675,63.475 v1(7.7,63.5)
NetR105_2: R105.2 U100.12 | length 33.7
  Bottom Layer w0.3: R105.2 7.65,64.95 8.6,64 12.8,64 18.6,69.8 18.6,82.6 19.235,83.235 U100.12
NetR106_1: R106.1 X103.3 | length 2.3
  Bottom Layer w0.3: R106.1 X103.3
NetR107_2: R107.2 U100.13 | length 26.1
  Bottom Layer w0.3: R107.2 9.7,60 19.218,69.517 19.218,80.078 U100.13
NetR108_1: R108.1 X104.3 | length 2.3
  Bottom Layer w0.3: R108.1 X104.3
NetR109_1: R109.1 X105.3 | length 2.3
  Bottom Layer w0.3: R109.1 X105.3
NetR110_1: R110.1 X106.3 | length 2.3
  Bottom Layer w0.3: R110.1 X106.3
NetR111_1: R111.1 R115.2 SW100.1 | length 4.4
  Bottom Layer w0.3: SW100.1 29.25,102.9 R111.1@31.25,102.9
NetR112_1: R112.1 X107.3 | length 2.3
  Bottom Layer w0.3: R112.1 X107.3
NetR116_1: R116.1 X108.3 | length 3.4
  Bottom Layer w0.3: X108.3 19.66,63.16 22.99,63.16 R116.1
NetU100_2: U100.2 U101.12 | length 13.6
  Bottom Layer w0.3: U101.12@5.66,102.255 7,100.914 7,92.4 6.535,91.935 U100.2
NetU100_6: U100.6 U101.8 | length 14.4
  Bottom Layer w0.3: U100.6 11.615,91.515 12.1,92 12.1,98.25 U101.8
NetU100_11: U100.11 U101.9 | length 18.1
  Bottom Layer w0.3: U101.9 14.61,103.3 16.4,103.3 17.2,102.5 17.2,92.2 17.965,91.435 U100.11
SEG_A: D100.2 U100.14 U101.11 | length 63.8
  Top Layer w0.3: U101.11 9.53,103.3 13.8,103.3 14.6,102.5 14.6,86 v1(16.8,83.8) ; D100.2 12.5,49.55 v1(12.5,64.7)
  Bottom Layer w0.3: v1(12.5,64.7) 17.983,70.183 17.983,80.078 U100.14 17.965,82.635 v1(16.8,83.8)
SEG_B: D101.2 U100.16 U101.7 | length 68.8
  Top Layer w0.3: D101.2 12.45,37.05 16.4,41 16.4,55.5 15.7,56.2 15.7,68.274 15.4,68.574 v1(15.4,68.6)
  Bottom Layer w0.3: v1(15.4,68.6) 15.8,69 15.8,78.4 15.425,78.775 U100.16 15.4,80.12 15.4,84.6 18.6,87.8 18.6,101.91 U101.7
SEG_C: D102.2 U100.20 U101.4 | length 84.6
  Top Layer w0.3: v1(10.3,78.5) 10.219,78.5 9.619,77.9 8.8,77.9 8.458,78.242 8.458,78.942 8.2,79.2 6.2,79.2 5.8,78.8 5.8,78.2 7.9,76.1 9.1,76.1 16.3,68.9 16.3,56.4 17,55.7 17,29.1 12.45,24.55 D102.2
  Bottom Layer w0.3: v1(10.3,78.5) 10.323,78.523 10.323,79.708 10.345,79.73 U100.20 10.345,82.445 12.25,84.35 12.25,91.25 13.37,92.37 U101.4
SEG_D: D103.2 U100.23 U101.2 | length 90.6
  Top Layer w0.3: v1(6.5,78.5) 8.3,76.7 9.4,76.7 16.9,69.2 16.9,56.6 17.6,55.9 17.6,17.2 12.45,12.05 D103.2
  Bottom Layer w0.3: v1@6.535,78.465 v1(6.5,78.5) 6.518,78.518 6.518,80.078 U100.23 6.535,86.735 7.17,87.37 7.17,91.67 8.076,92.576 8.076,94.226 U101.2
SEG_DP: D107.2 U100.22 U101.3 | length 92.9
  Top Layer w0.3: v1(7.8,78.5) 7.8,78 8.5,77.3 9.7,77.3 22.4,64.6 22.4,56.6 21.7,55.9 21.7,17.15 D107.2
  Bottom Layer w0.3: v1@7.803,78.503 7.803,80.093 U100.22 7.805,86.405 8.43,87.03 8.43,92.04 U101.3
SEG_E: D104.2 U100.21 U101.1 | length 59.3
  Top Layer w0.3: U101.1 9.1,91.09 v1(9.1,86.1) ; v1(9.115,78.605) 9.711,79.2 17.1,79.2 26.9,69.4 26.9,50.9 26.9,49.55 D104.2
  Bottom Layer w0.3: v1(9.1,86.1) 9.088,86.088 9.088,80.095 9.095,80.087 9.095,78.625 v1(9.115,78.605)
SEG_F: D105.2 U100.15 U101.10 | length 72.3
  Top Layer w0.3: U101.10 12.1,100.79 12.1,86.625 v1(16.7,82.025) ; v1(16.7,78.5) 23.6,71.6 23.6,56.2 22.9,55.5 22.9,40.95 D105.2
  Bottom Layer w0.3: v1(16.7,78.5) 16.698,78.502 16.698,80.093 U100.15 16.695,81.995 v1@16.7,82
SEG_G: D106.2 U100.17 U101.5 | length 76.6
  Top Layer w0.3: v1(14.8,78.5) 23,70.3 23,56.4 22.3,55.7 22.3,29.05 D106.2
  Bottom Layer w0.3: v1(14.8,78.5) 14.3,79 14.3,79.95 U100.17 14.155,85.055 16.06,86.96 16.06,91.36 15.91,91.51 U101.5
SYNC: J3.5 R116.2 | length 60.3
  Bottom Layer w0.25: J3.5 24.6,9.22 24.6,60.3 23.05,61.85 R116.2
USB_D_N: J2.10 USB100.3 | length 17.4
  Top Layer w0.25: J2.10 5.35,56 8.133,56 8.239,56.106 8.243,56.106 9.891,57.755 10.003,57.866 10.003,66.807 USB100.3@11.083,67.888
  Top Layer w0.5: USB100.3@11.083,67.888 USB100.3
USB_D_P: J2.8 USB100.2 | length 16.8
  Top Layer w0.25: J2.8 5.353,56.377 7.977,56.377 9.623,58.023 9.623,66.82 USB100.2
VBUS: J2.3 USB100.1 | length 8.2
  Top Layer w0.3: J2.3 2.99,63.8 4.9,63.8 6.015,64.915 USB100.1
pads on no net: D100. D101. D102. D103. D104. D105. D106. D107. SW100.S1 SW100.S2 U100.3 U100.5 U100.8 U100.10 U100.24 USB100.5 USB100.6 USB100.7 USB100.8 X100.2 X100.NC X101.2 X101.NC X102.2 X102.NC X103.2 X103.NC X104.2 X104.NC X105.2 X105.NC X106.2 X106.NC X107.2 X107.NC X108.2 X108.NC

## Polygon pours and split planes (outlines as drawn)
GND on Bottom Layer "NONET_L-01_P-001" (solid, pour order 1): 0,0 39.3,0 39.3,106.5 0,106.5
GND on Top Layer "NONET_L-01_P-001" (solid, pour order 0): 0,0 39.3,0 39.3,106.5 0,106.5

## Silkscreen, mask and mechanical layers (free items; w line width, h text height)
Top Overlay:
  rectangle: 3.3,86.4 8.3,91.4
  text "MIDICTRL" at 9.4,89.75 h2.75
  text "NU SYNTHS" at 9.453,88.411 h1.52
  text "Design: Noël Vissers" at 9.4,86.557 h1.52
  text "Rev.: v1.0.0 | 04/2025" at 9.4,85.026 h1.52
Mechanical 1:
  circle w0.05: c29.475,75 r5
  lines w0.25: 0,0 0,106.5 39.3,106.5 39.3,0 0,0
  text ".Pcb_File_Name_No_Path" at 0,106.771 h1.52

## Dimensions
0,106.5 to 39.3,106.5 on Mechanical 15
39.3,106.5 to 39.3,0 on Mechanical 15